# EAGLE board TarjetaLinea25c (2) - copia (1) (EAGLE 9.6.2)
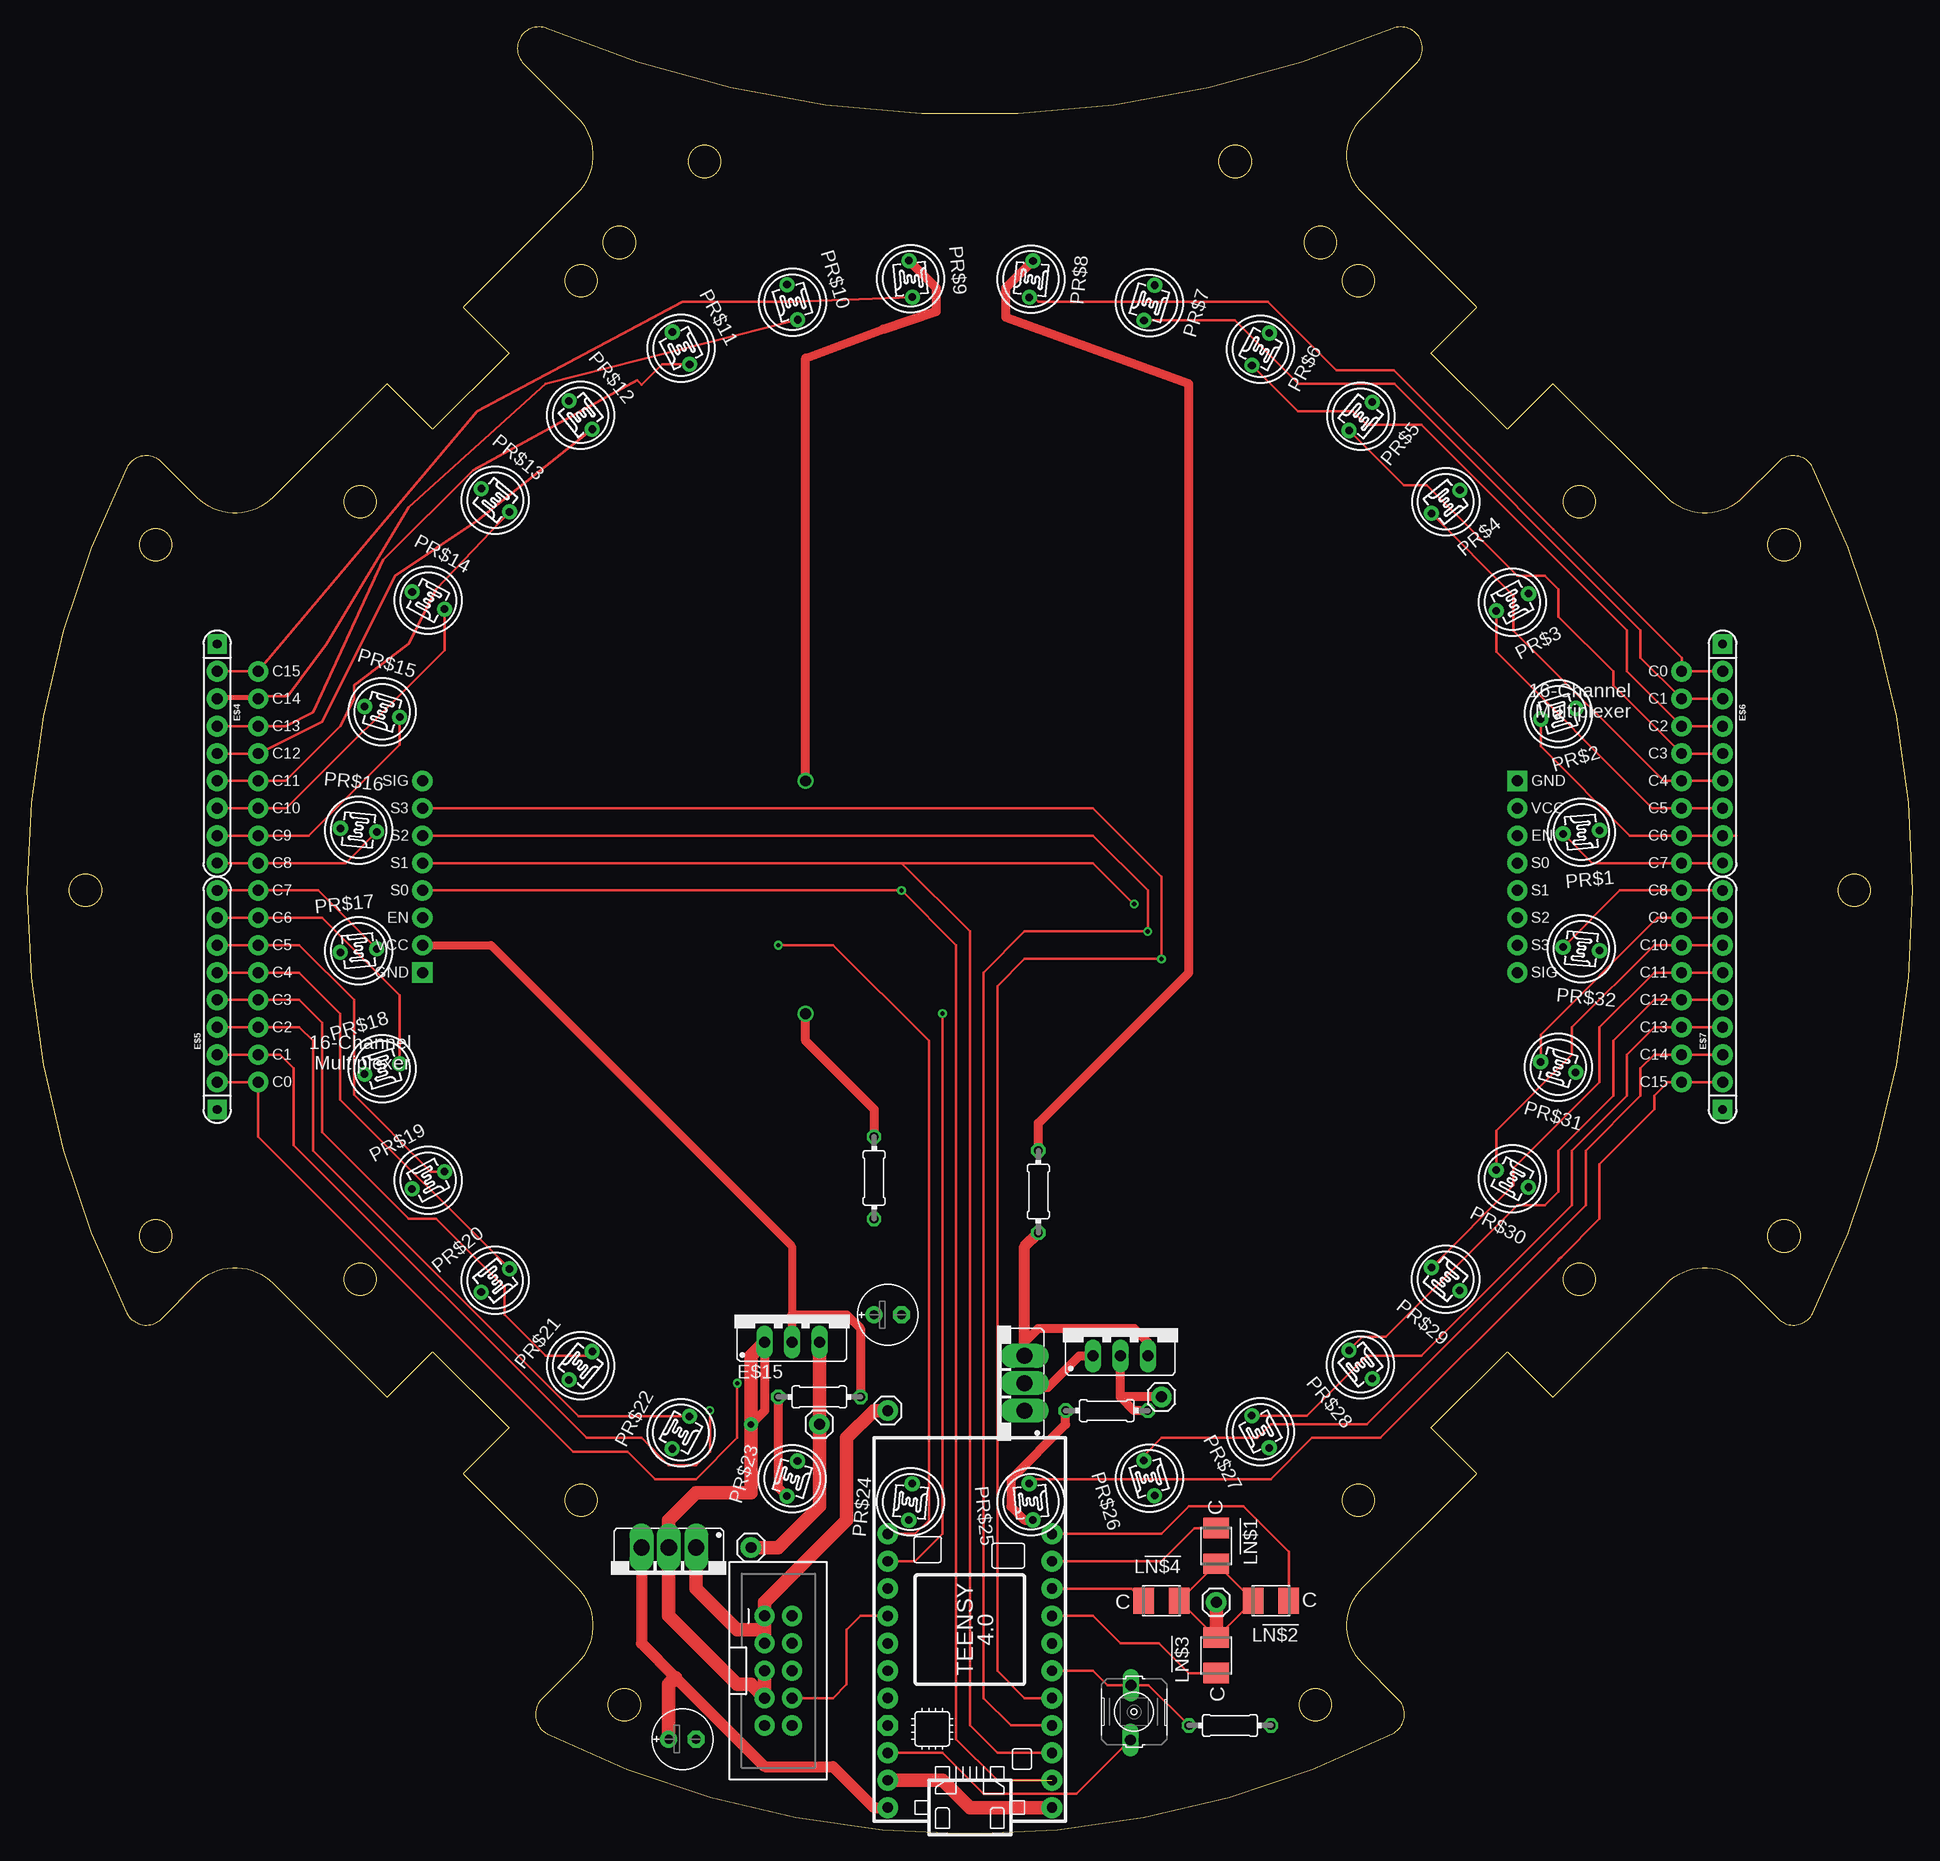
[diagram p0: board, top side]
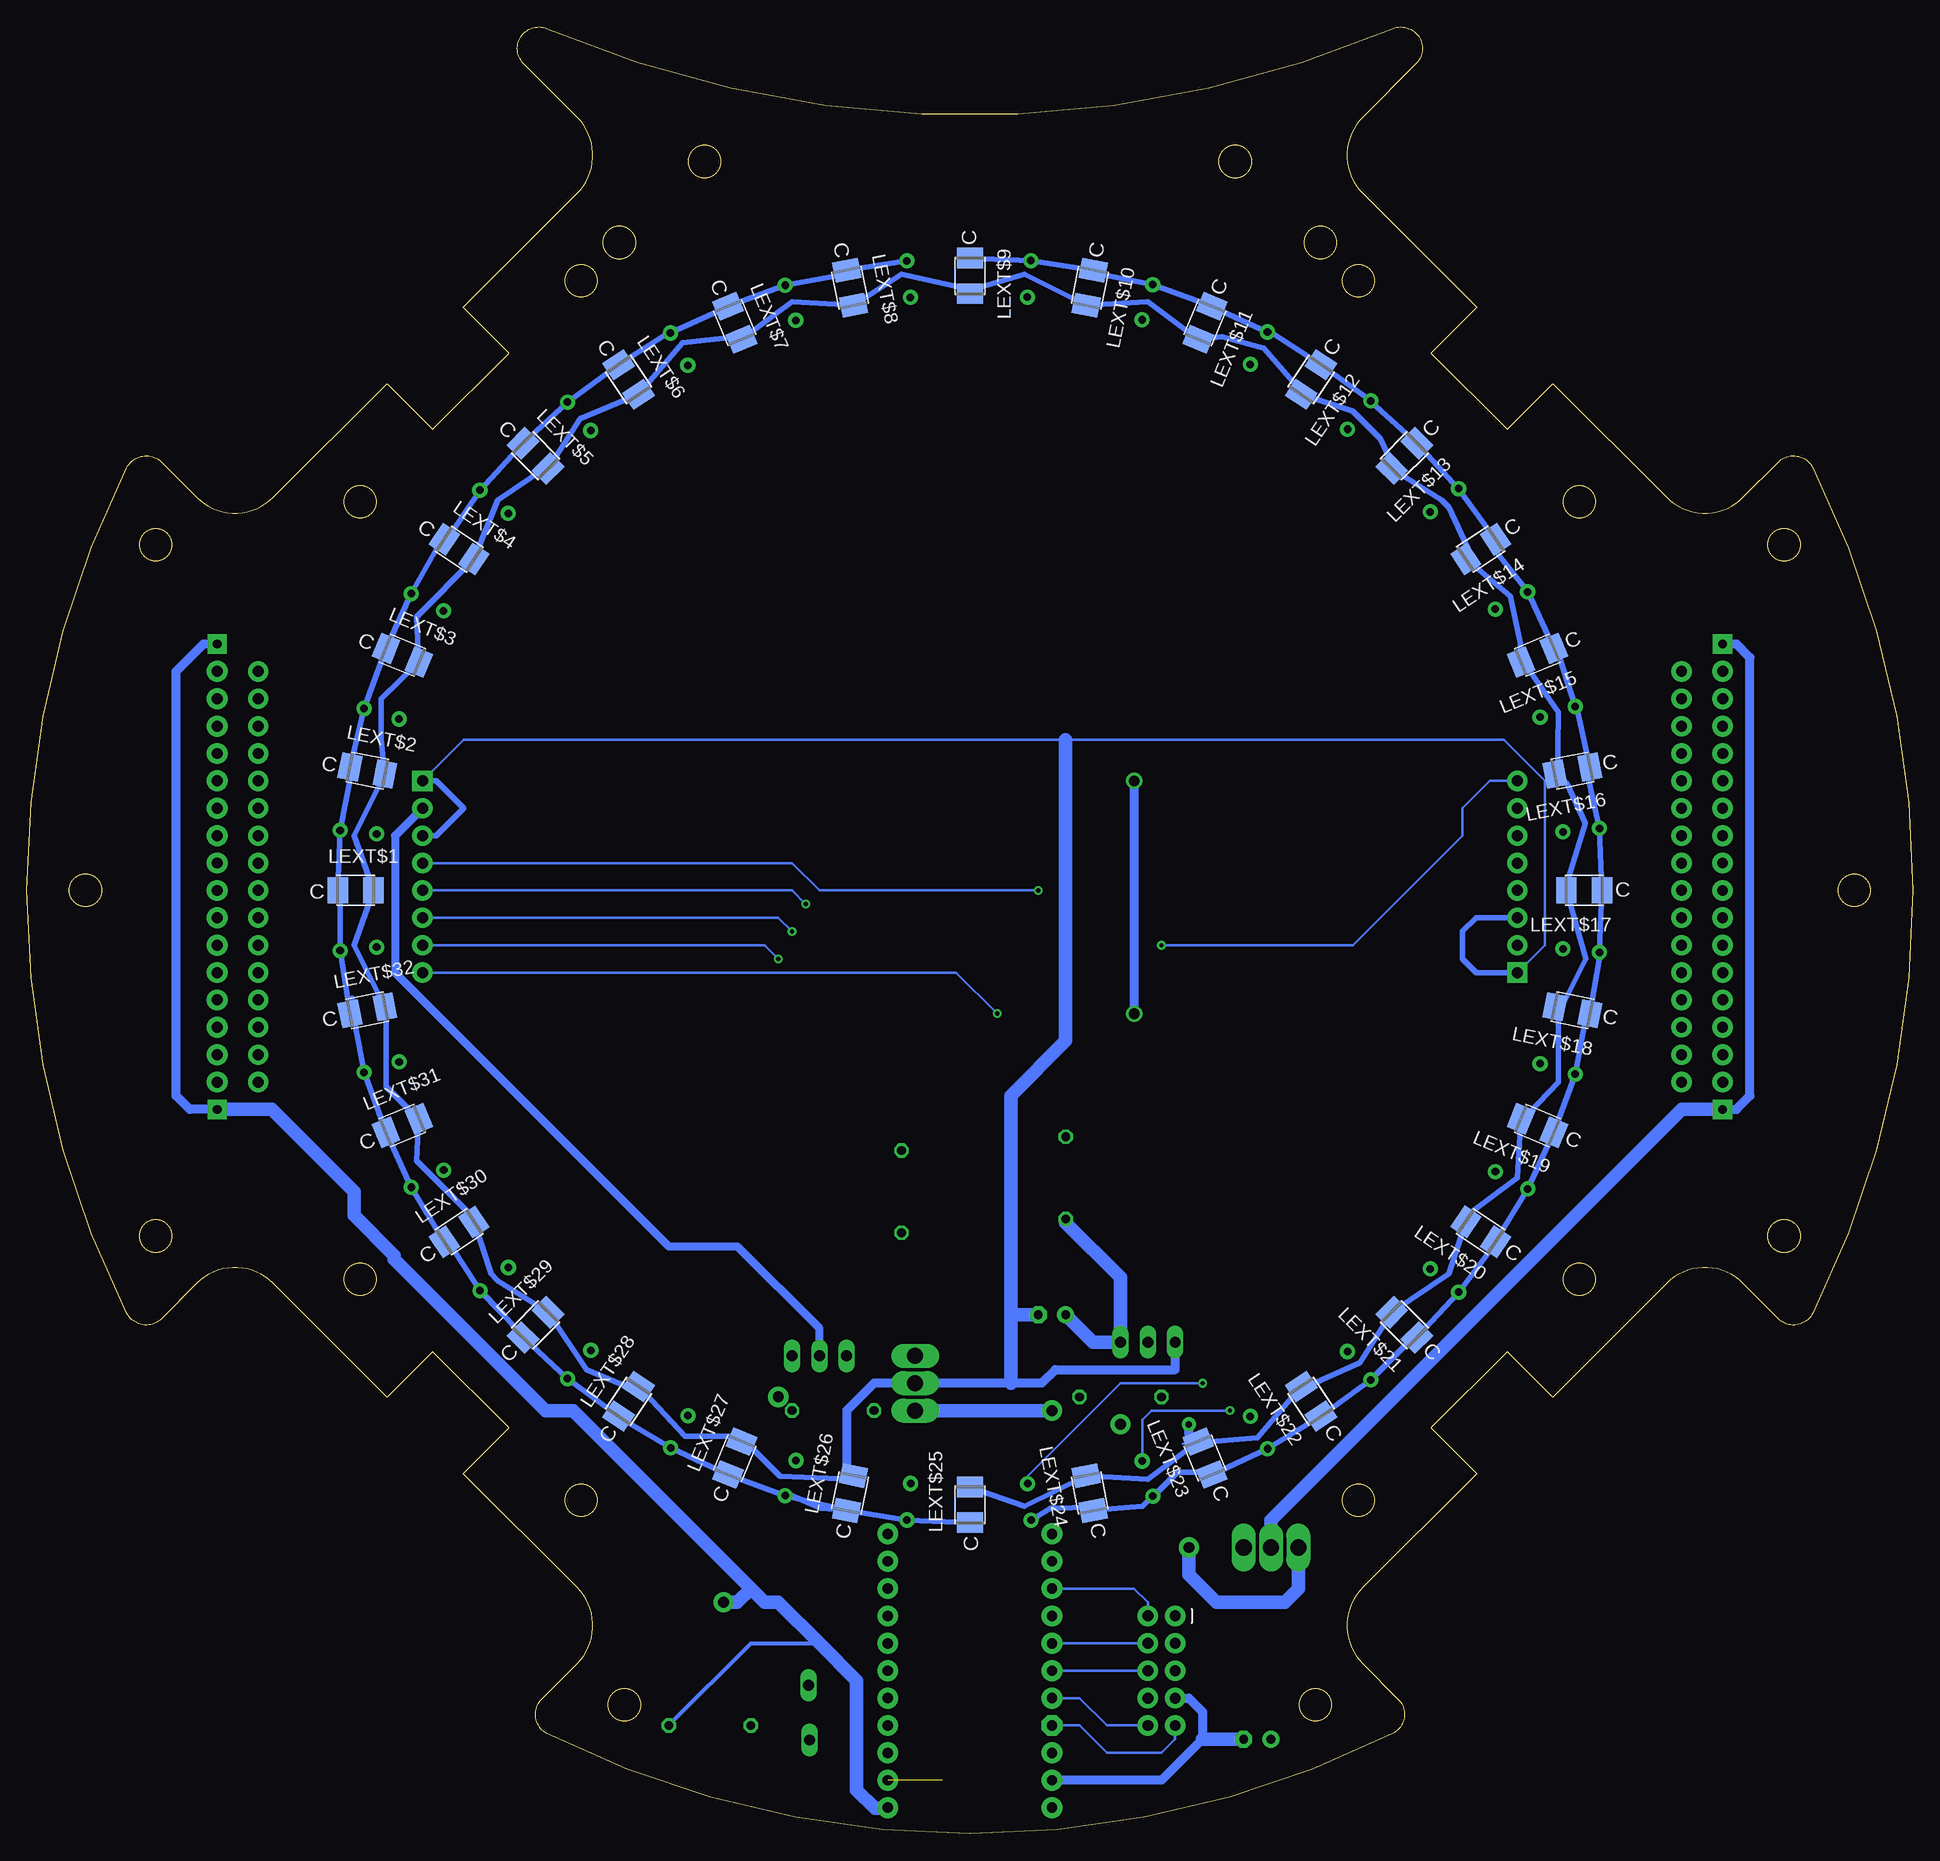
[diagram p1: board, bottom side, seen from below]

Size 175 x 167.6 mm. Coordinates in mm from the lower left corner, seen from the top.
Outline: 51.05,159.23 arc-90 51.05,152.16 40.48,141.59 44.72,137.35 37.65,130.28 33.41,134.52 22.84,123.95 arc-90 15.77,123.95 12.48,127.24 arc108 9.28,126.72 arc53 9.28,48.28 arc108 12.48,47.76 15.77,51.05 arc-90 22.84,51.05 33.41,40.48 37.65,44.72 44.72,37.65 40.48,33.41 51.05,22.84 arc-90 51.05,15.77 47.76,12.48 arc108 48.28,9.28 arc53 126.72,9.28 arc108 127.24,12.48 123.95,15.77 arc-90 123.95,22.84 134.52,33.41 130.28,37.65 137.35,44.72 141.59,40.48 152.16,51.05 arc-90 159.23,51.05 162.52,47.76 arc108 165.72,48.28 arc53 165.72,126.72 arc108 162.52,127.24 159.23,123.95 arc-90 152.16,123.95 141.59,134.52 137.35,130.28 130.28,137.35 134.52,141.59 123.95,152.16 arc-90 123.95,159.23 128.91,164.19 arc158 126.71,167.44 arc-46 48.29,167.44 arc158 46.09,164.19 51.05,159.23
Outline: circle at 144.07,51.44 radius 1.5
Outline: circle at 123.56,30.93 radius 1.5
Outline: circle at 62.89,155.12 radius 1.5
Outline: circle at 169.57,87.5 radius 1.5
Outline: circle at 5.43,87.5 radius 1.5
Outline: circle at 119.57,11.96 radius 1.5
Outline: circle at 119.57,11.96 radius 1.5
Outline: circle at 55.43,11.96 radius 1.5
Outline: circle at 30.93,51.44 radius 1.5
Outline: circle at 51.44,30.93 radius 1.5
Outline: circle at 144.07,123.56 radius 1.5
Outline: circle at 123.56,144.07 radius 1.5
Outline: circle at 30.93,123.56 radius 1.5
Outline: circle at 51.44,144.07 radius 1.5
Outline: circle at 163.04,55.43 radius 1.5
Outline: circle at 163.04,119.57 radius 1.5
Outline: circle at 11.96,55.43 radius 1.5
Outline: circle at 11.96,119.57 radius 1.5
Outline: circle at 112.11,155.12 radius 1.5
Outline: circle at 54.97,147.6 radius 1.5
Copper layers (1*16): Top 0.035mm / dielectric 1.5mm / Bottom 0.035mm
Design rules "default": minimum track width 6mil, minimum drill 0.35mm, track to track 6mil, track to pad 6mil, pad to pad 6mil, via to via 6mil, smd to smd 6mil, copper to edge 40mil, drill to drill 6mil, minimum pad ring 10mil, minimum via ring 8mil, stop-mask expansion 4mil, vias tented up to drill 0mil, thermal gap 10mil

## Footprints (pad centres in the part's own frame; a part is rotated, then mirrored left to right if it is on the bottom)
TEENSY_4.0 = drill 0.965 pad 1.93: 0/RX -13.97,-7.62; 1/TX -11.43,-7.62; 2 -8.89,-7.62; 3/CANTX -6.35,-7.62; 3V3_LO -11.43,7.62; 4/CANRX -3.81,-7.62; 5 -1.27,-7.62; 6 1.27,-7.62; 7 3.81,-7.62; 8 6.35,-7.62; 9/CS 8.89,-7.62; 16/A2 8.89,7.62; 17/A3 6.35,7.62; 18/A4/SDA 3.81,7.62; 19/A5/SCL 1.27,7.62; 20/A6 -1.27,7.62; 21/A7 -3.81,7.62; 22/A8 -6.35,7.62; GND -16.51,-7.62; GND2 -13.97,7.62; VIN -16.51,7.62 | drill 0.965 pad 1.93 octagon: 23/A9 -8.89,7.62
MUX16 = drill 1.016 pad 1.88: P$1 1.27,1.27; P$2 1.27,3.81; P$3 1.27,6.35; P$4 1.27,8.89; P$5 1.27,11.43; P$6 1.27,13.97; P$7 1.27,16.51; P$8 1.27,19.05; P$9 1.27,21.59; P$10 1.27,24.13; P$11 1.27,26.67; P$12 1.27,29.21; P$13 1.27,31.75; P$14 1.27,34.29; P$15 1.27,36.83; P$16 1.27,39.37; P$18 16.51,13.97; P$19 16.51,16.51; P$20 16.51,19.05; P$21 16.51,21.59; P$22 16.51,24.13; P$23 16.51,26.67; P$24 16.51,29.21 | drill 1.016 pad 1.88 square: P$17 16.51,11.43
RPACK-SIP-PTH-5 = drill 0.8 pad 1.778 square: P$1 0,0 | drill 1.016 pad 1.93: P$2 0,-2.54; P$3 0,-5.08; P$5 0,-10.16; P$6 0,-12.7 | drill 1 pad 1.93: P$4 0,-7.62; P$7 0,-15.24; P$8 0,-17.78; P$9 0,-20.32
2X5-SHROUDED = drill 1.016 pad 1.88: 1 -1.27,5.08; 2 1.27,5.08; 3 -1.27,2.54; 4 1.27,2.54; 5 -1.27,0; 6 1.27,0; 7 -1.27,-2.54; 8 1.27,-2.54; 9 -1.27,-5.08; 10 1.27,-5.08
B3F-10XX = drill 1.016 long: 1 -2.616,0.356; 3 2.464,0.279
78XXS_ = drill 1.499 pad 1.93 long: GND 0,-2.54; IN -2.54,-2.54; OUT 2.54,-2.54
0204/7 = drill 0.813 octagon: 1 -3.81,0; 2 3.81,0
1X01 = drill 1.016 pad 1.88: 1 0,0
TO220S = drill 1.016 long: 1 -2.54,-2.54; 2 0,-2.54; 3 2.54,-2.54
E2,5-6E = drill 0.813 pad 1.575: + -1.27,0 | drill 0.813 pad 1.575 octagon: - 1.27,0
3528-2PIN = smd 1.905 x 2.4: 1 -1.651,0 | smd 1.88 x 2.4: 2 1.651,0
T0-46-A10XX = drill 0.7 pad 1.4: 1 -1.7,0; 2 1.7,0

## Placement (x,y rotation side)
E$1  [TEENSY_4.0]  87.5,18.92 90 top
E$2  [MUX16]  20.19,68.45 0 top
E$3  [MUX16]  154.81,109.09 180 top
E$4  [RPACK-SIP-PTH-5]  17.65,110.36 0 top
E$5  [RPACK-SIP-PTH-5]  17.65,67.18 180 top
E$6  [RPACK-SIP-PTH-5]  157.35,110.36 0 top
E$7  [RPACK-SIP-PTH-5]  157.35,67.18 180 top
E$8  [2X5-SHROUDED]  69.72,15.11 0 top
E$9  [B3F-10XX]  102.74,11.3 90 top
E$10  [78XXS_]  59.56,24 180 top
E$11  [0204/7]  111.63,10.03 0 top
E$12  [1X01]  67.18,26.54 0 top
E$13  [1X01]  79.88,39.24 0 top
E$14  [78XXS_]  90.04,41.78 90 top
E$15  [TO220S]  70.99,48.13 0 top
E$16  [TO220S]  101.47,46.86 0 top
E$17  [1X01]  110.36,21.46 0 top
E$18  [E2,5-6E]  60.83,8.76 0 top
E$19  [0204/7]  73.53,40.51 180 top
E$20  [0204/7]  100.2,39.24 180 top
E$21  [0204/7]  78.61,60.83 90 top
E$23  [1X01]  105.28,40.51 0 top
E$24  [1X01]  73.53,37.97 0 top
E$25  [E2,5-6E]  79.88,48.13 0 top
E$26  [0204/7]  93.85,59.56 90 top
L!N$1  [3528-2PIN]  110.36,26.69 270 top
L!N$2  [3528-2PIN]  115.44,21.61 180 top
L!N$3  [3528-2PIN]  110.36,16.53 90 top
L!N$4  [3528-2PIN]  105.28,21.61 0 top
LEXT$1  [3528-2PIN]  144.5,87.5 0 bottom
LEXT$2  [3528-2PIN]  143.41,98.62 348.7 bottom
LEXT$3  [3528-2PIN]  140.16,109.31 337.5 bottom
LEXT$4  [3528-2PIN]  134.89,119.17 326.2 bottom
LEXT$5  [3528-2PIN]  127.81,127.81 315 bottom
LEXT$6  [3528-2PIN]  119.17,134.89 303.7 bottom
LEXT$7  [3528-2PIN]  109.31,140.16 292.5 bottom
LEXT$8  [3528-2PIN]  98.62,143.41 281.2 bottom
LEXT$9  [3528-2PIN]  87.5,144.5 270 bottom
LEXT$10  [3528-2PIN]  76.38,143.41 258.7 bottom
LEXT$11  [3528-2PIN]  65.69,140.16 247.5 bottom
LEXT$12  [3528-2PIN]  55.83,134.89 236.2 bottom
LEXT$13  [3528-2PIN]  47.2,127.81 225 bottom
LEXT$14  [3528-2PIN]  40.11,119.17 213.7 bottom
LEXT$15  [3528-2PIN]  34.84,109.31 202.5 bottom
LEXT$16  [3528-2PIN]  31.6,98.62 191.2 bottom
LEXT$17  [3528-2PIN]  30.5,87.5 180 bottom
LEXT$18  [3528-2PIN]  31.6,76.38 168.7 bottom
LEXT$19  [3528-2PIN]  34.84,65.69 157.5 bottom
LEXT$20  [3528-2PIN]  40.11,55.83 146.2 bottom
LEXT$21  [3528-2PIN]  47.2,47.2 135 bottom
LEXT$22  [3528-2PIN]  55.83,40.11 123.7 bottom
LEXT$23  [3528-2PIN]  65.69,34.84 112.5 bottom
LEXT$24  [3528-2PIN]  76.38,31.6 101.2 bottom
LEXT$25  [3528-2PIN]  87.5,30.5 90 bottom
LEXT$26  [3528-2PIN]  98.62,31.6 78.7 bottom
LEXT$27  [3528-2PIN]  109.31,34.84 67.5 bottom
LEXT$28  [3528-2PIN]  119.17,40.11 56.2 bottom
LEXT$29  [3528-2PIN]  127.81,47.2 45 bottom
LEXT$30  [3528-2PIN]  134.89,55.83 33.7 bottom
LEXT$31  [3528-2PIN]  140.16,65.69 22.5 bottom
LEXT$32  [3528-2PIN]  143.41,76.38 11.2 bottom
PR$1  [T0-46-A10XX]  144.24,92.91 5.4 top
PR$2  [T0-46-A10XX]  142.09,103.89 16.7 top
PR$3  [T0-46-A10XX]  137.84,114.24 27.9 top
PR$4  [T0-46-A10XX]  131.65,123.55 39.2 top
PR$5  [T0-46-A10XX]  123.76,131.48 50.5 top
PR$6  [T0-46-A10XX]  114.48,137.71 61.8 top
PR$7  [T0-46-A10XX]  104.15,142.01 73 top
PR$8  [T0-46-A10XX]  93.18,144.22 84.3 top
PR$9  [T0-46-A10XX]  82,144.23 95.5 top
PR$10  [T0-46-A10XX]  71.03,142.07 106.8 top
PR$11  [T0-46-A10XX]  60.69,137.8 118 top
PR$12  [T0-46-A10XX]  51.38,131.6 129.3 top
PR$13  [T0-46-A10XX]  43.47,123.69 140.6 top
PR$14  [T0-46-A10XX]  37.25,114.4 151.9 top
PR$15  [T0-46-A10XX]  32.96,104.07 163.1 top
PR$16  [T0-46-A10XX]  30.78,93.1 174.4 top
PR$17  [T0-46-A10XX]  30.78,81.91 185.6 top
PR$18  [T0-46-A10XX]  32.96,70.94 196.9 top
PR$19  [T0-46-A10XX]  37.24,60.61 208.1 top
PR$20  [T0-46-A10XX]  43.46,51.31 219.4 top
PR$21  [T0-46-A10XX]  51.37,43.41 230.7 top
PR$22  [T0-46-A10XX]  60.68,37.21 242 top
PR$23  [T0-46-A10XX]  71.02,32.94 253.2 top
PR$24  [T0-46-A10XX]  81.99,30.77 264.5 top
PR$25  [T0-46-A10XX]  93.17,30.78 275.7 top
PR$26  [T0-46-A10XX]  104.14,32.98 287 top
PR$27  [T0-46-A10XX]  114.47,37.28 298.2 top
PR$28  [T0-46-A10XX]  123.75,43.52 309.5 top
PR$29  [T0-46-A10XX]  131.65,51.44 320.8 top
PR$30  [T0-46-A10XX]  137.84,60.76 332.1 top
PR$31  [T0-46-A10XX]  142.09,71.1 343.3 top
PR$32  [T0-46-A10XX]  144.24,82.08 354.6 top

## Library data of the parts
E$1 = TEENSY 4.0
E$2 E$3 = MUX16
E$4-E$7 = SparkFun-Resistors
E$8 E$12 E$13 E$17 E$23 E$24 = SparkFun-Connectors
E$9 = switch-omron
E$10 E$14-E$16 = v-reg
E$11 E$18-E$21 E$25 E$26 = rcl
L!N$1-L!N$4 LEXT$1-LEXT$32 = LEDs_rev15b
PR$1-PR$32 = photo-elements

## Nets
3.3V$1: E$19.2 E$21.2 LEXT$9.1 LEXT$10.1 LEXT$11.1 LEXT$12.1 LEXT$13.1 LEXT$14.1 LEXT$15.1 LEXT$16.1 LEXT$17.1 LEXT$18.1 LEXT$19.1 LEXT$20.1 LEXT$21.1 LEXT$22.1 LEXT$23.1 LEXT$24.1 PR$9.2 PR$10.2 PR$11.2 PR$12.2 PR$13.2 PR$14.2 PR$15.2 PR$16.2 PR$17.2 PR$18.2 PR$19.2 PR$20.2 PR$21.2 PR$22.2 PR$23.2 PR$24.2
3.3V$2: E$20.2 E$26.2 LEXT$1.1 LEXT$2.1 LEXT$3.1 LEXT$4.1 LEXT$5.1 LEXT$6.1 LEXT$7.1 LEXT$8.1 LEXT$25.1 LEXT$26.1 LEXT$27.1 LEXT$28.1 LEXT$29.1 LEXT$30.1 LEXT$31.1 LEXT$32.1 PR$1.2 PR$2.2 PR$3.2 PR$4.2 PR$5.2 PR$6.2 PR$7.2 PR$8.2 PR$25.2 PR$26.2 PR$27.2 PR$28.2 PR$29.2 PR$30.2 PR$31.2 PR$32.2
5V1: E$1.VIN E$10.OUT E$12.1 E$15.3 E$18.+ E$21.1 E$24.1 E$25.+
7V: E$8.1 E$8.3 E$10.IN E$13.1 E$14.IN
GND: E$1.GND E$1.GND2 E$2.P$17 E$2.P$19 E$3.P$17 E$3.P$19 E$4.P$1 E$5.P$1 E$6.P$1 E$7.P$1 E$8.5 E$8.7 E$10.GND E$11.2 E$14.GND E$15.1 E$16.1 E$17.1 E$18.- E$25.- L!N$1.2 L!N$2.2 L!N$3.2 L!N$4.2 LEXT$1.2 LEXT$2.2 LEXT$3.2 LEXT$4.2 LEXT$5.2 LEXT$6.2 LEXT$7.2 LEXT$8.2 LEXT$9.2 LEXT$10.2 LEXT$11.2 LEXT$12.2 LEXT$13.2 LEXT$14.2 LEXT$15.2 LEXT$16.2 LEXT$17.2 LEXT$18.2 LEXT$19.2 LEXT$20.2 LEXT$21.2 LEXT$22.2 LEXT$23.2 LEXT$24.2 LEXT$25.2 LEXT$26.2 LEXT$27.2 LEXT$28.2 LEXT$29.2 LEXT$30.2 LEXT$31.2 LEXT$32.2
S$1: E$1.6 L!N$3.1
S$2: E$1.17/A3 E$3.P$24
S$3: E$1.16/A2 E$2.P$24
S$4: E$3.P$2 E$6.P$3 PR$7.1
S$5: E$14.OUT E$16.3 E$26.1
S$6: E$1.0/RX E$2.P$20 E$3.P$20
S$7: E$1.1/TX E$2.P$21 E$3.P$21
S$8: E$1.2 E$2.P$22 E$3.P$22
S$10: E$2.P$16 E$4.P$2 PR$9.1
S$11: E$2.P$15 E$4.P$3 PR$10.1
S$12: E$2.P$13 E$4.P$5 PR$12.1
S$13: E$2.P$12 E$4.P$6 PR$13.1
S$14: E$2.P$11 E$4.P$7 PR$14.1
S$15: E$2.P$10 E$4.P$8 PR$15.1
S$16: E$2.P$9 E$4.P$9 PR$16.1
S$17: E$2.P$8 E$5.P$9 PR$17.1
S$18: E$2.P$7 E$5.P$8 PR$18.1
S$19: E$2.P$6 E$5.P$7 PR$19.1
S$20: E$2.P$5 E$5.P$6 PR$20.1
S$21: E$2.P$4 E$5.P$5 PR$21.1
S$22: E$2.P$3 E$5.P$4 PR$22.1
S$23: E$2.P$2 E$5.P$3 PR$23.1
S$24: E$2.P$1 E$5.P$2 PR$24.1
S$25: E$3.P$16 E$7.P$2 PR$25.1
S$27: E$3.P$14 E$7.P$4 PR$27.1
S$28: E$3.P$13 E$7.P$5 PR$28.1
S$29: E$3.P$12 E$7.P$6 PR$29.1
S$30: E$3.P$11 E$7.P$7 PR$30.1
S$31: E$3.P$10 E$7.P$8 PR$31.1
S$32: E$3.P$9 E$7.P$9 PR$32.1
S$33: E$3.P$8 E$6.P$9 PR$1.1
S$34: E$3.P$7 E$6.P$8 PR$2.1
S$35: E$3.P$6 E$6.P$7 PR$3.1
S$36: E$3.P$5 E$6.P$6 PR$4.1
S$37: E$3.P$4 E$6.P$5 PR$5.1
S$38: E$3.P$3 E$6.P$4 PR$6.1
S$40: E$3.P$1 E$6.P$2 PR$8.1
S$41: E$1.3/CANTX E$2.P$23 E$3.P$23
S$42: E$3.P$18 E$16.2 E$20.1 E$23.1
S$43: E$1.8 L!N$1.1
S$44: E$1.20/A6 E$8.4
S$45: E$1.21/A7 E$8.6
S$46: E$1.18/A4/SDA E$8.2
S$47: E$1.19/A5/SCL E$8.8
S$48: E$1.22/A8 E$8.10
S$49: E$1.23/A9 E$8.9
S$53: E$1.4/CANRX E$9.3 E$11.1
S$54: E$1.3V3_LO E$9.1
S$56: E$1.9/CS L!N$2.1
S$57: E$1.7 L!N$4.1
S$58: E$3.P$15 E$7.P$3 PR$26.1
S$60: E$2.P$18 E$15.2 E$19.1
S$63: E$2.P$14 E$4.P$4 PR$11.1

## Tracks (layer width: path | path; a pad name or v marks a point on that pad's centre or on a via)
3.3V$1  (via drill 1)
  Top 0.813: v72.26,97.66 72.26,136.87 79.46,139.57 84.38,141.21 84.38,143.39 PR$9.2 | E$19.2 69.72,32.11 PR$23.2 | v72.26,76.07 72.26,73.53 78.61,67.18 E$21.2
  Bottom 0.254: 50.31,132.86 PR$12.2 | 59.56,139.3 PR$11.2 | 64.64,141.48 LEXT$11.1 | 76.07,144.8 LEXT$10.1 | LEXT$24.1 76.01,30.29 75.95,30.35 | 65.91,33.52 LEXT$23.1 | 55.12,38.61 55.04,38.68 LEXT$22.1 | 46.21,46.19 LEXT$21.1 45.55,46.82 PR$20.2 | 38.92,54.48 LEXT$20.1 | 30.29,76.01 LEXT$18.1 | 30.35,98.93 30.23,98.93 LEXT$16.1 | 31.2,104.43 PR$15.2 | 32.82,109.16 LEXT$15.1 | 38.92,119.25 LEXT$14.1
  Bottom 0.508: 50.31,132.86 LEXT$13.1 PR$13.2 LEXT$14.1 | PR$12.2 LEXT$12.1 59.56,139.3 | PR$11.2 64.64,141.48 | LEXT$11.1 PR$10.2 76.07,144.8 | LEXT$10.1 PR$9.2 LEXT$9.1 | PR$24.2 80.03,30.2 76.01,30.29 | LEXT$24.1 71.48,30.35 PR$23.2 70.45,31.31 68.24,33.52 65.91,33.52 | LEXT$23.1 PR$22.2 55.12,38.61 | LEXT$22.1 PR$21.2 45.55,46.82 | LEXT$21.1 PR$20.2 | PR$20.2 38.92,54.48 | LEXT$20.1 PR$19.2 LEXT$19.1 PR$18.2 30.29,76.01 | LEXT$18.1 29.08,81.15 PR$17.2 LEXT$17.1 PR$16.2 30.35,98.93 | LEXT$16.1 31.2,104.43 | PR$15.2 32.82,109.16 | LEXT$15.1 PR$14.2 38.92,119.25
  Bottom 0.813: v72.26,97.66 v72.26,76.07
3.3V$2
  Top 0.813: E$26.2 93.85,65.91 107.82,79.88 107.82,134.49 90.81,140.67 90.81,143.37 PR$8.2 | PR$25.2 92.57,29.09 91.31,30.35 91.31,32.89 96.39,37.97 E$20.2
  Bottom 0.254: 99.05,144.65 LEXT$8.1 | 110.36,141.48 LEXT$7.1 | 115.44,139.21 PR$6.2 | LEXT$6.1 120.2,136.08 | 132.93,124.63 PR$4.2 | 135.76,120.52 137.03,119.25 136.79,119.25 LEXT$4.1 | 145.94,87.51 LEXT$1.1 | PR$32.2 | 144.71,76.01 LEXT$32.1 | LEXT$30.1 135.76,54.72 135.76,54.48 | 133.24,50.65 PR$29.2 | 129.46,46.86 129.41,46.86 128.81,46.26 LEXT$29.1 | 120.52,38.92 LEXT$28.1 | 104.01,31.36 PR$26.2
  Bottom 0.508: LEXT$26.1 101.32,30.2 104.01,31.36 | 115.03,35.55 PR$27.2 | 133.24,50.65 130.71,48.1 LEXT$29.1 PR$28.2 LEXT$28.1 | 144.8,77.49 LEXT$32.1 PR$32.2 | 145.94,87.51 PR$32.2 | LEXT$1.1 PR$1.2 144.78,98.97 LEXT$2.1 PR$2.2 LEXT$3.1 PR$3.2 136.97,119.19 135.76,120.52 | 115.44,139.21 LEXT$6.1 PR$5.2 LEXT$5.1 PR$4.2 135.72,120.5 LEXT$4.1 | PR$6.2 110.36,141.48 | LEXT$7.1 PR$7.2 99.05,144.65 | LEXT$8.1 PR$8.2 | LEXT$26.1 PR$26.2 LEXT$27.1 PR$27.2 | PR$27.2 120.52,38.92 | PR$29.2 135.76,54.72 | LEXT$30.1 PR$30.2 LEXT$31.1 PR$31.2 144.71,76.01 | LEXT$25.1 PR$25.2 LEXT$26.1
5V1
  Top 1.016: E$1.VIN 78.61,2.41 74.8,6.22 68.45,6.22 60.2,14.48 57.02,17.65 E$10.OUT
  Top 1.27: E$15.3 E$24.1 73.53,30.35 69.72,26.54 E$12.1 | E$18.+ 59.56,13.84 60.2,14.48
  Bottom 0.762: 78.61,56.69 E$21.1
  Bottom 1.27: E$10.OUT 57.02,22.73 58.29,21.46 64.64,21.46 67.18,24 E$12.1 | E$25.+ 76.07,45.59 E$15.3 73.53,51.61 78.61,56.69
7V  (via drill 0.6 pad 1.3)
  Top 1.27: 68.45,18.92 E$8.1 68.45,21.46 76.07,29.08 76.07,36.7 78.61,39.24 E$13.1 | 68.45,18.92 E$8.3 | E$10.IN 62.1,22.73 65.91,18.92 68.45,18.92
  Bottom 1.27: E$13.1 E$14.IN
  other vias: 79.88,39.24
GND  (via drill 0.6 pad 1.3)
  Top 0.254: L!N$1.2 L!N$4.2 109.99,18.55 L!N$3.2 L!N$2.2 L!N$1.2
  Top 0.813: E$15.1 68.45,39.24 v67.18,37.97 | E$14.GND 92.99,41.37 94.71,41.37 97.66,44.32 E$16.1
  Top 1.27: E$15.1 67.18,44.32 67.18,31.62 62.1,31.62 59.56,29.08 E$10.GND 59.56,20.19 65.91,13.84 67.18,13.84 E$8.7 E$8.5 | E$1.GND2 84.96,4.95 87.5,2.41 E$1.GND | E$17.1 110.36,18.92 109.99,18.55
  Bottom 0.254: 109.09,138.85 LEXT$7.2 | LEXT$3.2 138.85,108.55 | 143.08,88.47 LEXT$1.2 | LEXT$31.2 138.85,66.46 139.57,67.18 | 134.09,56.62 LEXT$30.2 | LEXT$28.2 117.98,40.9 113.92,36.84 | 109.45,36.84 LEXT$27.2 | 98.44,32.89 LEXT$26.2 | 66.46,36.16 66.34,36.27 | 56.58,41.34 LEXT$22.2 | E$2.P$17 34.16,82.42 34.16,97.66 37.97,101.47 78.61,101.47 134.49,101.47 E$3.P$17 | LEXT$5.2 126.87,126.73 | LEXT$23.2 66.46,36.16 | 66.46,36.16 67.18,36.16 67.73,36.16 | LEXT$24.2 76.55,32.89 | 36.7,65.69 36.59,65.8 LEXT$19.2 | LEXT$18.2 32.89,76.56 32.89,76.07 | 87.35,143.23 LEXT$9.2 | 32.99,97.66 LEXT$16.2 32.89,98.45 32.89,104.01 | LEXT$15.2 36.7,109.31 | 57.21,134.3 LEXT$12.2 | 41.29,119.25 LEXT$14.2 | 48.2,126.8 LEXT$13.2
  Bottom 0.381: 101.47,17.65 107.82,17.65 E$11.2
  Bottom 0.508: 139.57,67.18 141.65,69.26 141.65,76.3 LEXT$32.2 144.65,82.42 LEXT$1.2 144.65,92.58 LEXT$2.2 142.11,101.47 142.11,105.28 LEXT$3.2 138.85,112.9 LEXT$4.2 131.32,123.7 126.87,126.73 | LEXT$31.2 138.85,62.42 134.09,57.67 134.09,56.62 | LEXT$30.2 131.95,51.94 131.32,51.31 LEXT$29.2 123.06,43.05 117.98,40.9 | LEXT$28.2 113.92,36.84 109.45,36.84 | LEXT$27.2 108.15,36.16 105.13,33.14 98.44,32.89 | LEXT$5.2 123.66,131.28 LEXT$6.2 114.17,138.3 109.09,138.85 | LEXT$20.2 43.05,51.94 LEXT$21.2 51.31,43.69 56.58,41.34 | LEXT$22.2 60.83,36.7 66.34,36.27 | 67.18,36.16 LEXT$23.2 70.99,32.89 LEXT$24.2 82.42,30.35 LEXT$25.2 | 41.78,57.02 36.7,60.83 LEXT$19.2 | 36.59,65.8 32.89,69.72 32.89,76.07 30.35,81.15 LEXT$17.2 31.93,88.77 30.39,93.71 32.11,97.46 LEXT$16.2 | 32.99,97.66 32.89,104.01 35.48,107.79 LEXT$15.2 36.43,110.42 37.34,114.81 LEXT$14.2 | 57.21,134.3 60.21,137.79 64.1,138.85 LEXT$11.2 70.99,142.11 LEXT$10.2 82.42,144.65 87.35,143.23 93.85,144.65 LEXT$8.2 104.01,142.11 LEXT$7.2 | LEXT$12.2 51.94,131.95 49.4,129.41 48.2,126.8 | 41.29,119.25 43.05,123.06 43.69,123.7 LEXT$13.2 | E$3.P$19 137.03,92.58 134.49,95.12 137.03,97.66 E$3.P$17 | E$2.P$17 40.51,79.88 41.78,81.15 41.78,83.69 40.51,84.96 E$2.P$19
  Bottom 0.813: LEXT$23.2 66.34,36.27 67.18,37.1 v67.18,37.97 | LEXT$26.2 98.93,33.58 98.93,39.24 96.39,41.78 E$14.GND 83.69,41.78 80.85,41.78 79.58,43.05 68.45,43.05 E$15.1 | E$8.7 67.18,12.57 65.91,11.3 65.91,8.76 69.72,4.95 E$1.GND2 | E$7.P$1 159.89,67.18 161.16,68.45 161.16,107.82 158.62,110.36 E$6.P$1 | E$5.P$1 16.38,67.18 15.11,68.45 15.11,109.09 16.38,110.36 E$4.P$1
  Bottom 1.27: 83.69,41.78 83.69,48.13 | 83.69,48.13 83.69,68.45 78.61,73.53 78.61,101.47 | E$10.GND 59.56,29.08 21.46,67.18 E$5.P$1 | E$1.GND 95.19,2.34 96.3,2.34 96.32,2.34 98.02,4.04 98.02,14.2 101.47,17.65 105.28,21.46 106.55,21.46 107.82,22.73 | 107.82,22.73 124.33,39.24 126.87,39.24 140.91,53.28 140.91,53.63 144.65,57.36 144.65,59.56 152.27,67.18 E$7.P$1 | E$17.1 109.09,21.46 107.82,22.73 | E$25.- 83.69,48.13 | E$18.- 65.91,8.76
S$1
  Top 0.254: L!N$3.1 107.81,14.88 105.04,17.65 101.47,17.65 98.93,20.19 E$1.6
S$2  (via drill 0.4)
  Top 0.254: v84.96,76.07 84.96,27.81 82.42,25.27 E$1.17/A3
  Bottom 0.254: v84.96,76.07 88.77,79.88 E$3.P$24
S$3  (via drill 0.4)
  Top 0.254: E$1.16/A2 82.42,27.81 83.69,29.08 83.69,73.53 74.8,82.42 v69.72,82.42
  Bottom 0.254: v69.72,82.42 51.94,82.42 41.78,92.58 41.78,95.12 39.24,97.66 E$2.P$24
S$4
  Top 0.254: E$6.P$3 E$3.P$2 149.73,109.09 149.73,111.63 126.87,134.49 117.98,134.49 112.08,140.39 PR$7.1
S$5
  Top 0.813: E$14.OUT 92.58,45.59 93.85,46.86 102.74,46.86 104.01,45.59 E$16.3
  Top 1.016: E$14.OUT 92.58,54.48 E$26.1
S$6  (via drill 0.4)  (2 unrouted)
  Top 0.254: E$2.P$20 v81.15,87.5 86.23,82.42 86.23,8.76 90.04,4.95 E$1.0/RX
  Bottom 0.254: v81.15,87.5 101.47,87.5 104.01,90.04 E$3.P$20
S$7  (via drill 0.4)
  Top 0.254: v102.74,86.23 98.93,90.04 E$2.P$21 81.15,90.04 87.5,83.69 87.5,10.03 90.04,7.49 E$1.1/TX
  Bottom 0.254: E$3.P$21 104.01,87.5 v102.74,86.23
S$8  (via drill 0.4)
  Top 0.254: E$2.P$22 98.93,92.58 104.01,87.5 v104.01,83.69 92.58,83.69 88.77,79.88 88.77,12.57 91.31,10.03 E$1.2
  Bottom 0.254: v104.01,83.69 105.28,84.96 E$3.P$22
S$10
  Top 0.254: E$4.P$2 E$2.P$16 21.64,108.08 41.78,131.95 60.83,142.11 70.99,142.11 PR$9.1
S$11
  Top 0.254: E$2.P$15 E$4.P$3 17.86,105.49 24.21,105.49 27.81,110.36 35.43,123.06 48.13,134.49 PR$10.1
S$12
  Top 0.254: E$4.P$5 E$2.P$13 27.39,103.16 34.16,116.71 41.78,121.79 PR$12.1
S$13
  Top 0.254: E$4.P$6 E$2.P$12 24,97.66 29.08,102.74 30.35,105.28 30.35,106.55 35.43,110.36 37.97,115.44 PR$13.1
S$14
  Top 0.254: E$2.P$11 E$4.P$7 24.08,95.12 38.75,109.79 PR$14.1
S$15
  Top 0.254: PR$15.1 34.59,101.03 26.14,92.58 E$2.P$10 E$4.P$8
S$16
  Top 0.254: PR$16.1 29.58,90.04 E$4.P$9 E$2.P$9
S$17
  Top 0.254: PR$17.1 27.05,87.5 E$5.P$9 E$2.P$8
S$18
  Top 0.254: PR$18.1 34.58,77.79 27.41,84.96 E$5.P$8 E$2.P$7
S$19
  Top 0.254: E$2.P$6 E$5.P$7 25.27,82.42 30.35,77.34 30.35,68.53 37.47,61.41 PR$19.1
S$20
  Top 0.254: E$5.P$6 E$2.P$5 25.27,79.88 29.08,76.07 29.08,68.09 PR$20.1
S$21
  Top 0.254: E$5.P$5 E$2.P$4 25.27,77.34 27.4,75.21 27.4,65.05 35.43,57.02 37.97,57.02 44.32,50.67 44.32,48.13 48.13,44.32 52.04,44.32 PR$21.1
S$22
  Top 0.254: E$2.P$3 E$5.P$4 25.27,74.8 26.54,73.53 26.54,63.37 51.2,38.71 PR$22.1
S$23  (via drill 0.4)
  Top 0.254: E$5.P$3 E$2.P$2 23.49,72.26 24.76,70.99 24.76,63.88 51.94,36.7 57.02,36.7 59.56,34.16 62.1,34.16 63.37,35.43 v63.37,39.24
  Bottom 0.254: PR$23.1 71.51,38.37 70.64,39.24 v63.37,39.24
S$24  (via drill 0.4)
  Top 0.254: E$5.P$2 E$2.P$1 21.46,64.64 50.67,35.43 55.75,35.43 58.29,32.89 62.1,32.89 65.91,36.7 v65.91,41.78
  Bottom 0.254: PR$24.1 82.42,32.73 82.42,32.89 73.53,41.78 v65.91,41.78
S$25
  Top 0.254: PR$25.1 93.42,32.89 115.44,32.89 119.25,36.7 125.6,36.7 142.04,53.14 142.19,53.32 142.36,53.46 145.92,57.02 145.92,62.1 151,67.18 151,68.45 152.27,69.72 E$3.P$16 E$7.P$2
S$27
  Top 0.254: E$3.P$14 E$7.P$4 151,74.8 148.46,72.26 148.46,68.45 143.38,63.37 143.38,58.29 129.41,44.32 124.33,44.32 118.79,38.78 PR$27.1
S$28
  Top 0.254: E$7.P$5 E$3.P$13 151,77.34 147.19,73.53 147.19,68.45 142.11,63.37 142.11,59.56 140.84,58.29 138.3,58.29 126.11,46.1 123.94,46.1 PR$28.1
S$29
  Top 0.254: E$7.P$6 E$3.P$12 151,79.88 145.92,74.8 145.92,69.72 137.95,61.75 137.95,60.14 PR$29.1
S$30
  Top 0.254: E$7.P$7 E$3.P$11 151,82.42 143.38,74.8 143.38,72.26 136.33,65.21 PR$30.1
S$31
  Top 0.254: E$3.P$10 E$7.P$8 151.29,84.96 140.46,74.13 PR$31.1
S$32
  Top 0.254: E$3.P$9 E$7.P$9 147.81,87.5 PR$32.1
S$33
  Top 0.254: E$3.P$8 E$6.P$9 145.26,90.04 PR$1.1
S$34
  Top 0.254: E$3.P$7 E$6.P$8 | 158.62,92.58 E$6.P$8 | E$6.P$8 148.75,92.58 140.46,100.86 PR$2.1
S$35
  Top 0.254: E$3.P$6 E$6.P$7 150.85,95.12 136.34,109.63 PR$3.1
S$36
  Top 0.254: E$3.P$5 E$6.P$6 151.9,97.66 137.95,111.6 137.95,114.86 PR$4.1
S$37
  Top 0.254: E$6.P$5 E$3.P$4 147.19,106.55 147.19,107.82 142.11,112.9 142.11,115.44 140.84,116.71 138.3,116.71 129.92,125.09 127.76,125.09 PR$5.1
S$38
  Top 0.254: E$6.P$4 E$3.P$3 148.46,107.82 148.46,111.63 129.41,130.68 124.33,130.68 123.06,131.95 117.94,131.95 PR$6.1
S$40
  Top 0.254: E$6.P$2 E$3.P$1 153.54,109.09 141.64,121 141.62,121 126.86,135.76 121.49,135.76 115.14,142.11 93.85,142.11 93.44,142.52 PR$8.1
S$41  (via drill 0.4)
  Top 0.254: E$2.P$23 98.93,95.12 105.28,88.77 v105.28,81.15 92.58,81.15 90.04,78.61 90.04,15.11 92.58,12.57 E$1.3/CANTX
  Bottom 0.254: v105.28,81.15 106.55,82.42 E$3.P$23
S$42
  Top 0.813: 101.47,43.05 E$16.2 101.47,40.51 | E$20.1 102.74,39.24 101.47,40.51 | E$23.1 101.47,40.51
  Bottom 0.762: E$3.P$18 140.84,92.58 140.84,79.88 115.44,54.48 109.09,54.48 101.47,46.86 E$16.2
S$43
  Top 0.254: L!N$1.1 108.35,28.34 105.28,25.27 E$1.8
S$44
  Bottom 0.254: E$1.20/A6 E$8.4
S$45
  Bottom 0.254: E$1.21/A7 E$8.6
S$46
  Bottom 0.254: E$8.2 70.99,21.46 72.26,22.73 E$1.18/A4/SDA
S$47
  Top 0.254: E$8.8 74.8,12.57 76.07,13.84 76.07,18.92 77.34,20.19 E$1.19/A5/SCL
S$48
  Bottom 0.254: E$8.10 74.8,10.03 77.34,12.57 E$1.22/A8
S$49
  Bottom 0.254: E$8.9 68.45,8.76 69.72,7.49 74.8,7.49 77.34,10.03 E$1.23/A9
S$53
  Top 0.254: E$11.1 104.09,13.76 E$9.3 100.28,13.76 98.93,15.11 E$1.4/CANRX
S$54
  Top 0.254: E$9.1 97.38,3.68 88.77,3.68 84.96,7.49 E$1.3V3_LO
  Bottom 0.254: E$9.1 102.38,9.12
S$56
  Top 0.254: L!N$2.1 117.09,26.16 112.9,30.35 107.82,30.35 105.28,27.81 E$1.9/CS
S$57
  Top 0.254: L!N$4.1 102.51,22.73 E$1.7
S$58
  Top 0.254: E$7.P$3 E$3.P$15 151,72.26 149.73,70.99 149.73,68.45 144.65,63.37 144.65,58.29 124.33,37.97 115.44,37.97 114.17,36.7 105.28,36.7 103.64,35.06 PR$26.1
S$60
  Top 0.762: 70.99,48.13 E$15.2 70.99,54.48 43.05,82.42 E$2.P$18
  Top 0.813: 70.99,48.13 76.07,48.13 77.34,46.86 E$19.1
S$63
  Top 0.254: E$4.P$4 E$2.P$14 24,102.74 26.54,104.01 33.07,118.16 41.38,126.47 56.6,134.83 57.04,134.39 58.95,136.3 PR$11.1